# Altium PCB PCB1.PcbDoc
Units mil, origin at the board's own origin, x right, y up, seen from the top; angles counter-clockwise.
Board outline 3700 x 3500 mil, 2 copper layers (Top Layer, Bottom Layer); 47 components, 38 nets, 172 pads, 28 vias.
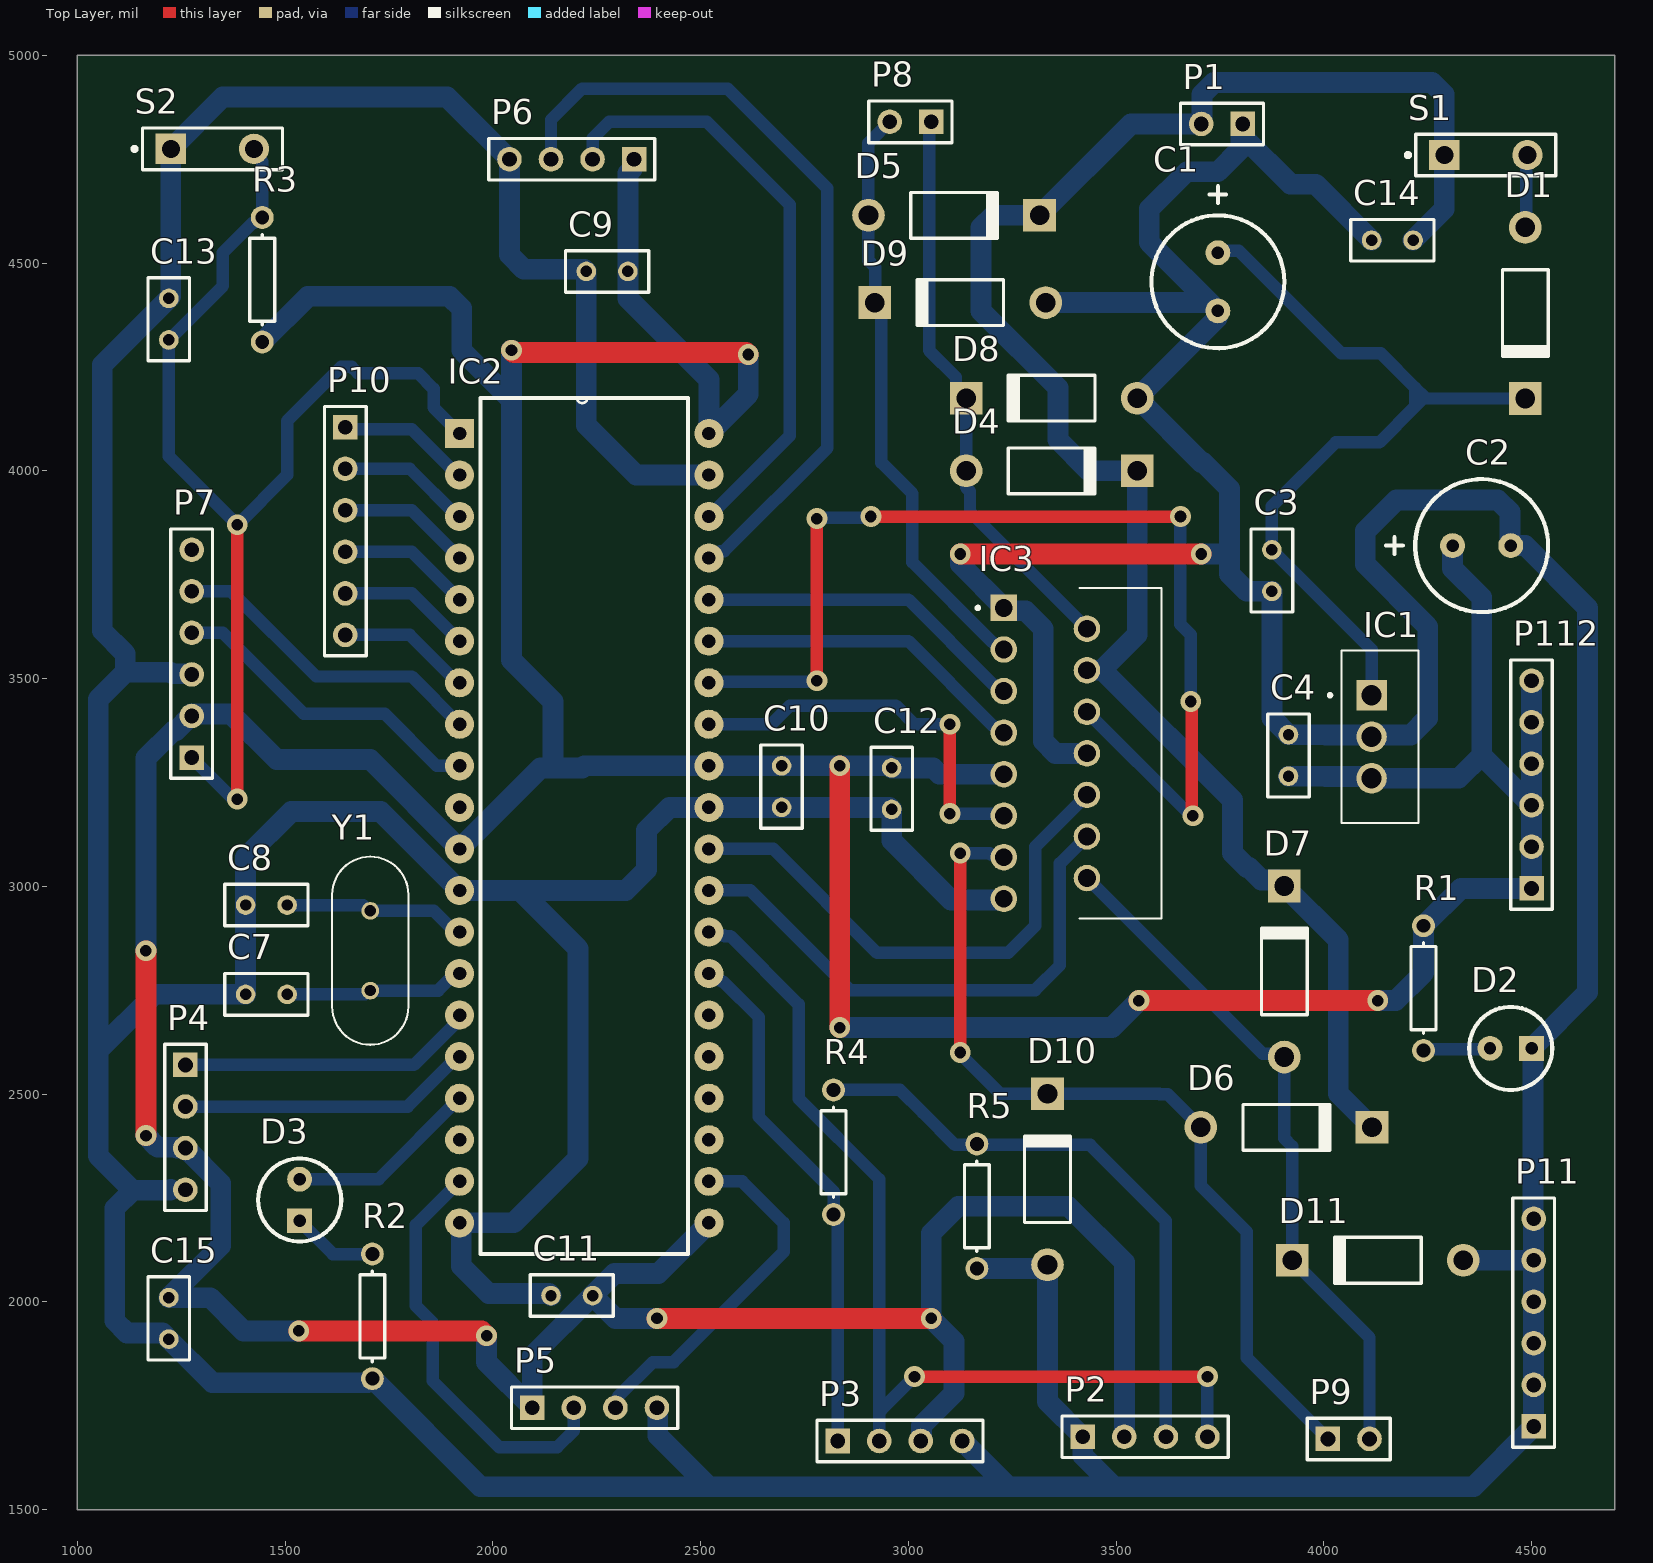
[diagram p0: Top Layer view]
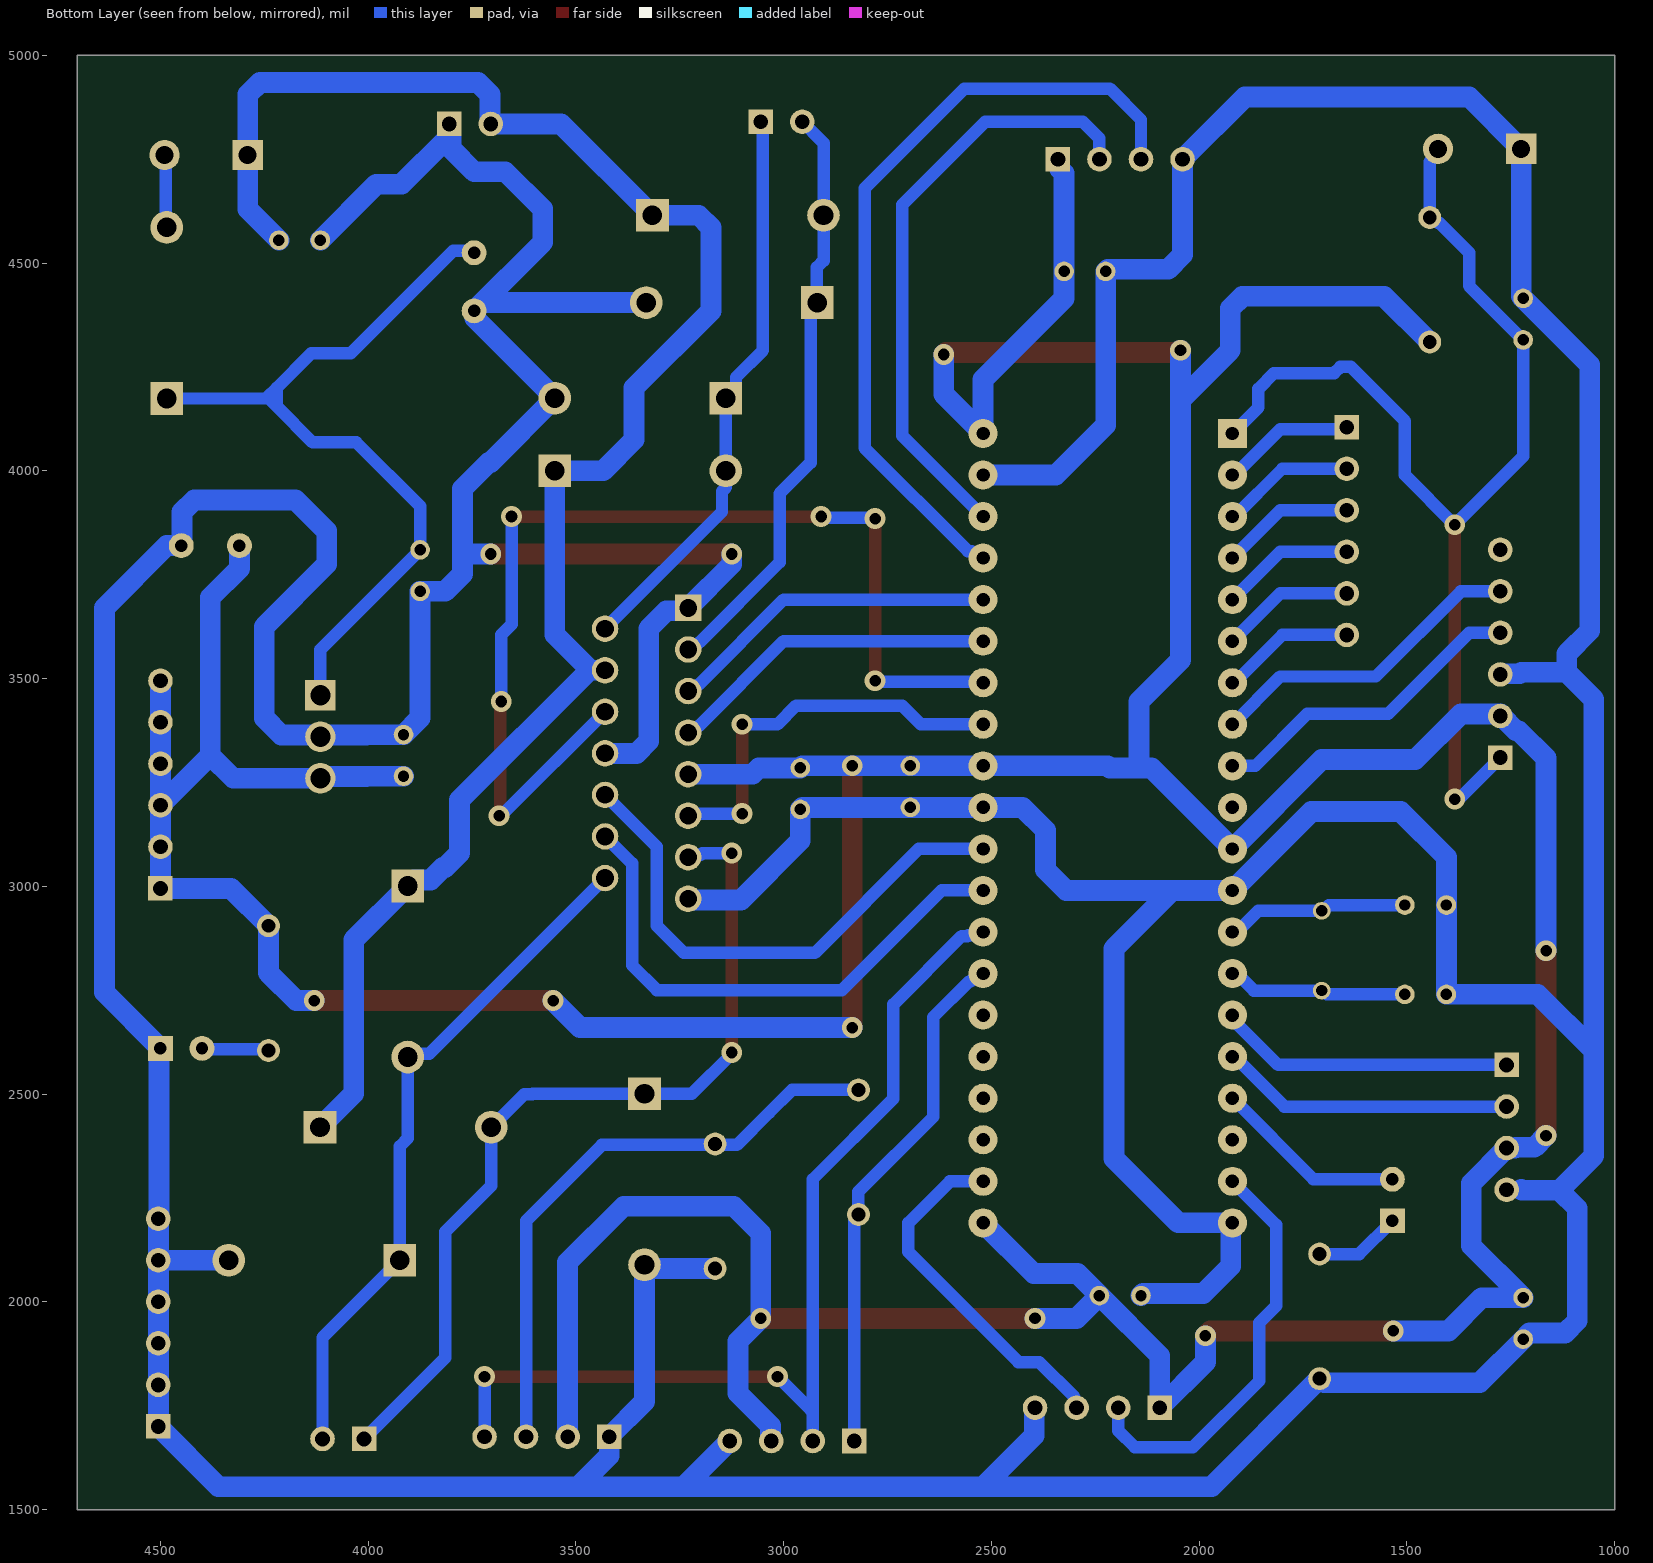
[diagram p1: Bottom Layer view, seen from below]

## Layer stack, top to bottom
Top Solder: solder mask 0.4, Solder Resist, Dk 3.5
Top Layer: signal copper 1.4
Dielectric 1: dielectric 12.6, FR-4, Dk 4.8
Bottom Layer: signal copper 1.4
Bottom Solder: solder mask 0.4, Solder Resist, Dk 3.5

## Board outline
1000,1500 1000,5000 4700,5000 4700,1500

## Design rules (kind name [scope] priority, off if disabled: settings)
Clearance [All] p1: gap=10 ignorepadtopadclearanceinfootprint=FALSE except(0: Arc-Hole Track-Hole SMDPad-Hole THPad-Hole Via-Hole Fill-Hole Poly-Hole Region-Hole Text-Hole)
PolygonConnect [All] p1: connectstyle=Relief reliefconductorwidth=10 reliefentries=4 polygonreliefangle="90 Angle" airgapwidth=10
RoutingPriority RoutingPriority_1 [OnLayer('Top Layer')] p1: routingpriority=100
RoutingPriority [OnLayer('Bottom Layer')] p2: routingpriority=1
RoutingTopology RoutingTopology_1 [OnLayer('Top Layer')] p1: topology=Vertical
RoutingTopology [All] p2: topology=Shortest
RoutingVias [All] p1: holewidth=28 width=50 viastyle="Through Hole" minholewidth=28 minwidth=50 maxholewidth=28 maxwidth=50
SolderMaskExpansion [All] p1: expansion=4 istentingtop=FALSE
Width WidthSignal [InNetClass('SIGNAL')] p1: maxlimit=30 minlimit=30 preferedwidth=30 minimp=50.000000 maximp=50.000000 favimp=50.000000
Width WidthPower [InNetClass('POWER')] p2: maxlimit=50 minlimit=50 preferedwidth=50 minimp=50.000000 maximp=50.000000 favimp=50.000000
Width [All] p3: maxlimit=10 minlimit=10 preferedwidth=10
28 further rules are at their usual default settings.

## Classes and differential pairs
net class SIGNAL: ENA ENB IN1 IN2 IN3 IN4 MCLR NetC1_1 NetD1_1 NetD2_1 NetD3_1 NetD3_2 OUT1 OUT2 OUT3 OUT4 PGC PGD RB0 RB1 RB2 RB3 RB4 RB5 RB9 RB10 RD2 RD3 Rx_bluetooth Tx_bluetooth U1ARX U1ATX U2TX XTAL1 XTAL2
net class POWER: 5V GND VCC

## Components (designator, comment, footprint, x,y, rotation, side; value= is the part's Value field where it differs from the comment)
C1 "Cap Pol1" "elektrolitski kondenzator" 3745,4455 r270 top value=470u
C2 "Cap Pol1" "elektrolitski kondenzator" 4380,3820 r0 top value=470u
C3 "Cap" RAD-0.1 3875,3760 r90 top value=100n
C4 "Cap" RAD-0.1 3915,3315 r270 top value=100n
C7 "Cap" RAD-0.1 1455,2740 r0 top value=22p
C8 "Cap" RAD-0.1 1455,2955 r0 top value=22p
C9 "Cap" RAD-0.1 2275,4480 r180 top value=100n
C10 "Cap" RAD-0.1 2695,3240 r270 top value=100n
C11 "Cap" RAD-0.1 2190,2015 r180 top value=100n
C12 "Cap" RAD-0.1 2960,3235 r270 top value=100n
C13 "Cap" RAD-0.1 1220,4365 r270 top value=100n
C14 "Cap" RAD-0.1 4165,4555 r0 top value=100n
C15 "Cap" RAD-0.1 1220,1960 r90 top value=100n
D1 "Diode 1N4007" DO-41 4485,4380 r270 top
D2 "LED0" "LED dioda" 4450,2610 r180 top
D3 "LED0" "LED dioda" 1535,2245 r90 top
D4 "Diode 1N4007" DO-41 3345,4000 r0 top
D5 "Diode 1N4007" DO-41 3110,4615 r0 top
D6 "Diode 1N4007" DO-41 3910,2420 r0 top
D7 "Diode 1N4007" DO-41 3905,2795 r90 top
D8 "Diode 1N4007" DO-41 3345,4175 r180 top
D9 "Diode 1N4007" DO-41 3125,4405 r180 top
D10 "Diode 1N4007" DO-41 3335,2295 r90 top
D11 "Diode 1N4007" DO-41 4130,2100 r180 top
IC1 "LM7805CT/NOPB" TO254P1054X470X1955-3 4115,3360 r270 top
IC2 "DSPIC30F4013-30I/P" Mikrokontroler 2215,3145 r0 top
IC3 "L298N" TO127P2020X500X2100-15 3230,3670 r0 top
P1 "Header 2" HDR1X2 3805,4835 r180 top
P2 "Bluetooth" HDR1X4 3420,1675 r0 top
P3 "Prisluskivanje" HDR1X4 2830,1665 r0 top
P4 "UART komunikacija" HDR1X4 1260,2570 r270 top
P5 "HC-SR04" HDR1X4 2095,1745 r0 top
P6 "HC-SR04" HDR1X4 2340,4750 r180 top
P7 "Programator" HDR1X6 1275,3310 r90 top
P8 "Motor1" HDR1X2 3055,4840 r180 top
P9 "Motor2" HDR1X2 4010,1670 r0 top
P10 "GPIO" HDR1X6 1645,4105 r270 top
P11 "GND" HDR1X6 4505,1700 r90 top
P112 "Header 6" HDR1X6 4500,2995 r90 top
R1 "Res2" AXIAL-0.3 4240,2755 r90 top value=1k
R2 "Res2" AXIAL-0.3 1710,1965 r270 top value=1k
R3 "Res2" AXIAL-0.3 1445,4460 r270 top value=10k
R4 "Res2" AXIAL-0.3 2820,2360 r270 top value=4k7
R5 "Res2" AXIAL-0.3 3165,2230 r90 top value=10k
S1 "SW-SPST" SPST-2 4390,4760 r0 top
S2 "SW-PB" SPST-2 1325,4775 r0 top
Y1 "HC-49/U-S16000000ABJB" XTAL_HC49P488W43L1150T466H350 1705,2845 r270 top

## Footprints (in the part's own frame and the unit in brackets; to place one, negate y for a bottom-side part, rotate by r counter-clockwise, add the part's x,y. Pads: shape width x height; smd on the part's side, far side on the other; paste and mask are expansions set on the pad)
AXIAL-0.3 [mm] "Axial Device, Thru-Hole; 2 Leads; 0.3 in Pin Spacing"
  round 1.4 hole 0.85: 1(-3.81,0) 2(3.81,0)
  silkscreen extent -2.77,-0.76 2.77,0.76
DO-41 [mm] "Diode, Axial; Body 5.2 x 2.7 mm (LxDia. max), Lead Dia. 0.86 mm (max)"
  round 2 hole 1.2: 1(-5.23,0)
  rect 2x2 hole 1.2: 2(5.23,0)
  silkscreen extent -2.65,-1.4 2.75,1.4
"elektrolitski kondenzator" [mil]
  round 60 hole 30: 1(-70,0) 2(70,0)
  silkscreen extent -230,-160 160,160
HDR1X2 [mm] "Connector; Header; 2 Position"
  rect 1.5x1.5 hole 0.9: 1(0,0)
  round 1.5 hole 0.9: 2(2.54,0)
  silkscreen extent -1.27,-1.27 3.81,1.27
HDR1X4 [mm] "Connector; Header; 4 Position"
  rect 1.5x1.5 hole 0.9: 1(0,0)
  round 1.5 hole 0.9: 2(2.54,0) 3(5.08,0) 4(7.62,0)
  silkscreen extent -1.27,-1.27 8.89,1.27
HDR1X6 [mm] "Connector; Header; 6 Position"
  rect 1.5x1.5 hole 0.9: 1(0,0)
  round 1.5 hole 0.9: 2(2.54,0) 3(5.08,0) 4(7.62,0) 5(10.16,0) 6(12.7,0)
  silkscreen extent -1.27,-1.27 13.97,1.27
"LED dioda" [mil]
  round 60 hole 30: 1(50,0)
  rect 60x60 hole 30: 2(-50,0)
  silkscreen extent -100,-100 100,100
Mikrokontroler [mil]
  rect 70x70 hole 32: 1(-295,945)
  round 70 hole 32: 2(-295,845) 3(-295,745) 4(-295,645) 5(-295,545) 6(-295,445) 7(-295,345) 8(-295,245) 9(-295,145) 10(-295,45) 11(-295,-55) 12(-295,-155) 13(-295,-255) 14(-295,-355) 15(-295,-455) 16(-295,-555) 17(-295,-655) 18(-295,-755) 19(-295,-855) 20(-295,-955) 21(305,-955) 22(305,-855) 23(305,-755) 24(305,-655) 25(305,-555) 26(305,-455) 27(305,-355) 28(305,-255) 29(305,-155) 30(305,-55) 31(305,45) 32(305,145) 33(305,245) 34(305,345) 35(305,445) 36(305,545) 37(305,645) 38(305,745) 39(305,845) 40(305,945)
  silkscreen extent -245,-1030 255,1030
RAD-0.1 [mm] "Radial Cap, Thru-Hole; 2 Leads; 0.1 in Pin Spacing"
  round 1.2 hole 0.7: 1(-1.27,0) 2(1.27,0)
  silkscreen extent -2.54,-1.27 2.54,1.27
SPST-2 [mm] "Switch; 2 Leads"
  rect 1.85x1.85 hole 1.1: 1(-2.54,0)
  round 1.85 hole 1.1: 2(2.54,0)
  silkscreen extent -4.89,-1.27 4.28,1.27
TO127P2020X500X2100-15 [mm]
  rect 1.62x1.62 hole 1.08: 1(0,0)
  round 1.62 hole 1.08: 2(5.08,-1.27) 3(0,-2.54) 4(5.08,-3.81) 5(0,-5.08) 6(5.08,-6.35) 7(0,-7.62) 8(5.08,-8.89) 9(0,-10.16) 10(5.08,-11.43) 11(0,-12.7) 12(5.08,-13.97) 13(0,-15.24) 14(5.08,-16.51) 15(0,-17.78)
  silkscreen extent -1.69,-18.99 9.63,1.21
TO254P1054X470X1955-3 [mm]
  rect 1.86x1.86 / inner round 1.86 / far side rect 1.86x1.86 hole 1.24: 1(-2.54,0)
  round 1.86 hole 1.24: 2(0,0) 3(2.54,0)
  silkscreen extent -5.27,-2.64 5.27,2.86
XTAL_HC49P488W43L1150T466H350 [mm]
  round 1.08 hole 0.68: 1(-2.44,0) 2(2.44,0)
  silkscreen extent -5.75,-2.33 5.75,2.33, body extent -5.75,-2.33 5.75,2.33, height 3.5

## Part data
C1 C2: "Polarized Capacitor (Radial)", LatestRevisionDate=17-Jul-2002, LatestRevisionNote="Re-released for DXP Platform.", PackageDescription="Polarized Capacitor (Radial); 2 Leads", PackageReference=RB7.6-15, Published=8-Jun-2000, Publisher="Altium Limited"
C3 C4 C7 C8 C9 C10 C11 C12 C13 C14 C15: "Capacitor", LatestRevisionDate=17-Jul-2002, LatestRevisionNote="Re-released for DXP Platform.", PackageDescription="Radial Cap, Thru-Hole; 2 Leads; 0.3 in Pin Spacing", PackageReference=RAD-0.3, Published=8-Jun-2000, Publisher="Altium Limited"
D1 D4 D5 D6 D7 D8 D9 D10 D11: "1 Amp General Purpose Rectifier", Code_JEDEC=DO-204-AL, ComponentLink1Description="Manufacturer Link", ComponentLink1URL=http://www.fairchildsemi.com/, ComponentLink2Description=Datasheet, ComponentLink2URL=http://www.fairchildsemi.com/ds/1N%2F1N4001.pdf, DatasheetVersion=1998, LatestRevisionDate=17-Jul-2002, LatestRevisionNote="Re-released for DXP Platform.", PackageDescription="Diode, Axial; Body 5.2 x 2.7 mm (LxDia. max), Lead Dia. 0.86 mm (max)", PackageReference=DO-41, PackageVersion=Aug-1999, Published=8-Jun-2000, Publisher="Altium Limited"
D2 D3: "Typical INFRARED GaAs LED", LatestRevisionDate=08-Jul-2005, LatestRevisionNote="Mech Layer 1 removed.", PackageDescription="LED; 2 Leads", PackageReference=LED-0, Published=8-Jun-2000, Publisher="Altium Limited"
IC1: Package=None, Availability=Unavailable, MF="{'manufacturer': u'Texas Instruments'}", MP=LM7805CT/NOPB, Price=None
IC2: "Digital Signal Processors, DSP, DSC General Purpose", Package="DIP-40 Microchip", Check_prices=https://www.snapeda.com/parts/DSPIC30F4013-30I/P/Microchip/view-part/?ref=eda, MF=Microchip, MP=DSPIC30F4013-30I/P, SnapEDA_Link=https://www.snapeda.com/parts/DSPIC30F4013-30I/P/Microchip/view-part/?ref=snap
IC3: "Dual Full Bridge Motor Driver 15-Pin(15+Tab) MULTIWATT V Tube", Package=None, Availability=Unavailable, MP=L298N, Price=None
P1: "Header, 2-Pin", LatestRevisionDate=17-Jul-2002, LatestRevisionNote="Re-released for DXP Platform.", Publisher="Altium Limited"
P2 P3 P4 P5 P6: library part "Header 4", "Header, 4-Pin", LatestRevisionDate=17-Jul-2002, LatestRevisionNote="Re-released for DXP Platform.", Publisher="Altium Limited"
P7 P10 P11: library part "Header 6", "Header, 6-Pin", LatestRevisionDate=17-Jul-2002, LatestRevisionNote="Re-released for DXP Platform.", Publisher="Altium Limited"
P8 P9: library part "Header 2", "Header, 2-Pin", LatestRevisionDate=17-Jul-2002, LatestRevisionNote="Re-released for DXP Platform.", Publisher="Altium Limited"
P112: "Header, 6-Pin", LatestRevisionDate=17-Jul-2002, LatestRevisionNote="Re-released for DXP Platform.", Publisher="Altium Limited"
R1 R2 R3 R4 R5: "Resistor", LatestRevisionDate=17-Jul-2002, LatestRevisionNote="Re-released for DXP Platform.", PackageDescription="Axial Device, Thru-Hole; 2 Leads; 0.4 in Pin Spacing", PackageReference=AXIAL-0.4, Published=8-Jun-2000, Publisher="Altium Limited"
S1: "Single-Pole, Single-Throw Switch", LatestRevisionDate=17-Jul-2002, LatestRevisionNote="Re-released for DXP Platform.", PackageDescription="Switch; 2 Leads", PackageReference=SPST-2, Published=24-Mar-1999, Publisher="Altium Limited"
S2: "Switch", LatestRevisionDate=17-Jul-2002, LatestRevisionNote="Re-released for DXP Platform.", PackageDescription="Switch; 2 Leads", PackageReference=SPST-2, Published=24-Mar-1999, Publisher="Altium Limited"
Y1: "16 MHz Â±30ppm Crystal 18pF 50 Ohms HC-49/US", Package="HC-49/US Citizen Finetech Miyota", Check_prices=https://www.snapeda.com/parts/HC-49/U-S16000000ABJB/Citizen/view-part/?ref=eda, MF="Citizen Finedevice", MP=HC-49/U-S16000000ABJB, SnapEDA_Link=https://www.snapeda.com/parts/HC-49/U-S16000000ABJB/Citizen/view-part/?ref=snap

## Via types
v1: diameter 50, hole 28, Top Layer to Bottom Layer, 28 vias

## Nets (pads, with @x,y where several pads share a name; then routed paths per layer and width w, separated by ;. In a path a pad name is that pad's centre, name@x,y a point inside that pad or via, vN(x,y) a via of type N, cw(c..) or ccw(c..) an arc to the next point about the centre after c; other vN are vias at no path point)
5V: C2.1 C4.2 C9.1 C10.1 C11.1 C12.1 C15.2 IC1.3 IC2.11 IC2.21 IC2.32 IC2.40 IC3.9 P2.2 P3.3 P4.3 P5.1 P6.1 P7.2 P112.1 P112.2 P112.3 P112.4 P112.5 P112.6 R1.2 R3.2 | length 15463
  Top Layer w50: v1(1165,2845) 1165.05,2844.95 v1(1165.05,2399.95) ; v1(1533.04,1930) 1973.2,1930 v1(1985,1918.2) ; v1(2045,4290) 2050,4285 2610,4285 v1(2615,4280) ; v1(2395,1960) v1(3055,1960) ; v1(2835,2660) v1(2835,3290) ; v1(3555,2725) v1(4130,2725)
  Bottom Layer w50: v1(1165,2845) 1165,3308.55 1230.97,3374.53 1237.08,3374.53 1272.55,3410 1272.55,3411.73 P7.2@1275,3414.18 ; v1(1165.05,2399.95) 1193.27,2371.73 1238.27,2371.73 1240,2370 P4.3 1345,2285 1345,2135 C15.2 1320,2010 1400,1930 v1(1533.04,1930) ; P7.2@1275,3415 1370,3415 1480,3305 1705,3305 IC2.11 2115,3285 2145,3285 ; R3.2 1555,4420 1895.71,4420 1925,4390.71 1925,4290 2045,4170 ; v1(1985,1918.2) 1985,1855 P5.1 2095,1870 C11.1 ; v1(2045,4290) 2045,4170 ; P6.1 2335.47,4745.47 2335.47,4726.66 2325,4716.18 2325,4415 2520,4220 IC2.40 2615,4185 v1(2615,4280) ; v1(2395,1960) 2295,1960 C11.1 ; IC2.21 2398.09,2068.09 2293.09,2068.09 C11.1 ; v1(2835,2660) 3490,2660 v1(3555,2725) ; P3.3 3031.73,1666.73 3031.73,1701.73 3110,1780 3110,1905 v1(3055,1960) 3055,2165 3120,2230 3385,2230 3520,2095 P2.2 ; IC3.9 3075,3270 3060,3285 C12.1 2955,3290 v1(2835,3290) C10.1 IC2.32 2220,3290 2215,3285 2145,3285 ; C4.2 4003.71,3265 4004.27,3264.44 4110.56,3264.44 IC1.3 4325,3260 4380,3315 ; v1(4130,2725) 4173.22,2725 4240,2791.78 R1.2 4330,2995 P112.1 P112.2 P112.3 ; C2.1 4310,3765 4380,3695 4380,3315 ; P112.6 P112.5 P112.4 P112.3 ; 2045,4170 2045,3545 2145,3445 2145,3285 ; 4380,3315 P112.3
ENA: IC2.34 IC3.6 | length 2593.1
  Top Layer w30: v1(2780,3495) v1(2780,3885) ; v1(2910,3890) v1(3655,3890) ; v1(3680,3445) 3682.5,3442.5 3682.5,3172.5 v1(3685,3170)
  Bottom Layer w30: IC2.34 2522.5,3492.5 2777.5,3492.5 v1(2780,3495) ; v1(2780,3885) 2782.5,3887.5 2907.5,3887.5 v1(2910,3890) ; IC3.6 v1@3675,3175 ; v1@3655,3875 3655,3630.25 3680,3605.25 v1(3680,3445)
ENB: IC2.33 IC3.11 | length 964.4
  Top Layer w30: v1(3100,3175) v1(3100,3390)
  Bottom Layer w30: IC2.33 2670,3390 2715,3435 2970,3435 3015,3390 v1(3100,3390) ; v1(3100,3175) 3225,3175 IC3.11
GND: C1.2 C2.2 C3.1 C4.1 C7.1 C8.1 C9.2 C10.2 C11.2 C12.2 C13.1 C14.1 C15.1 D2.2 D8.1 D9.1 D10.1 D11.1 IC1.2 IC2.12 IC2.20 IC2.31 IC2.39 IC3.1 IC3.8 IC3.15 P1.1 P2.1 P3.4 P4.4 P5.4 P6.4 P7.3 P11.1 P11.2 P11.3 P11.4 P11.5 P11.6 R2.2 R5.1 S2.1 | length 22360.7
  Top Layer w50: v1(3125,3800) v1(3705,3800)
  Bottom Layer w50: 1225,2270 1223.27,2268.27 1133.27,2268.27 ; P7.3 1273.27,3511.73 1228.27,3511.73 1225,3515 1115,3515 ; C11.2 2135,2020 1990,2020 1923.83,2086.17 1923.83,2186.17 IC2.20 2050,2190 2205,2345 2205,2850 2065,2990 ; P5.4 2396.73,1743.27 2396.73,1678.27 2520,1555 ; IC2.39@2516.17,3993.83 IC2.39 2345,3990 2225,4110 C9.2 2220,4485 2075,4485 2040,4520 P6.4 1890,4900 1350,4900 S2.1 1225,4420 C13.1 1060,4255 1060,3615 1115,3560 1115,3515 ; v1(3125,3800) 3125,3775 IC3.1 3236.89,3663.11 3281.89,3663.11 3325,3620 3325,3349.29 3354.29,3320 IC3.8@3426.27,3320 ; P3.4 3230,1565 3230,1555 ; R5.1 3318.13,2080 3327.22,2089.09 D10.1 3335,1760 P2.1 3420,1630 3495,1555 ; IC3.15 3227.36,2967.36 3102.64,2967.36 2960,3110 C12.2 2955,3190 C10.2 2425,3190 2370,3135 2370,3040 2320,2990 2065,2990 ; D9.1 3722.29,4405 ; v1(3705,3800) 3773.27,3800 ; 3800.47,4800.47 3800.47,4775.47 3745,4720 3670,4720 3580,4630 3580,4550 C1.2 3743.09,4383.09 3743.09,4367.18 D8.1 3705.91,4020 3710,4020 3773.27,3956.73 3773.27,3800 ; P1.1 3809.53,4830.47 3809.53,4800.47 3920,4690 3980,4690 C14.1 ; D11.1 P11.5 ; 1050,2605 1050,3450 1115,3515 ; 1050,2605 1185,2740 C7.1 C8.1 1405,3070 1515,3180 1730,3180 IC2.12 2065,2990 ; 1050,2605 1050,2351.53 1133.27,2268.27 ; 1133.27,2268.27 1090,2225 1090,1954.29 1119.29,1925 1205,1925 C15.1 1325,1805 1698.62,1805 1708.62,1815 R2.2 1970,1555 2520,1555 ; 2520,1555 3230,1555 ; 3230,1555 3495,1555 ; 3495,1555 4360,1555 P11.1 P11.2 P11.3 P11.4 P11.5 ; 3773.27,3800 3773.27,3751.73 3815,3710 C3.1 3875,3405 C4.1 4003.71,3365 4004.27,3364.44 4110.56,3364.44 IC1.2 4119.44,3364.44 4209.44,3364.44 4250,3405 4250,3625 4100,3775 4100,3855 4175,3930 4418.8,3930 4448.09,3900.71 4448.09,3821.91 C2.2 4485,3820 4635,3670 4635,2745 D2.2 4503.27,2606.73 4503.27,2201.73 P11.6 P11.5
IN1: IC2.36 IC3.5 | length 801.1
  Bottom Layer w30: IC2.36 3000,3690 3203.11,3486.89 3203.97,3486.89 3220.86,3470 IC3.5
IN2: IC2.35 IC3.7 | length 801.1
  Bottom Layer w30: IC2.35 3000,3590 3203.11,3386.89 3203.97,3386.89 3220.86,3370 IC3.7
IN3: IC2.30 IC3.10 | length 1282.3
  Bottom Layer w30: IC2.30 2675,3090 2925,2840 3240,2840 3305,2905 3305,3095 IC3.10
IN4: IC2.29 IC3.12 | length 1306.2
  Bottom Layer w30: IC2.29 2620,2990 2860,2750 3305,2750 3365,2810 3365,3055 IC3.12
MCLR: C13.2 IC2.1 P7.1 R3.1 S2.2 | length 2753.4
  Top Layer w30: v1(1385,3210) v1(1385,3870)
  Bottom Layer w30: P7.1 1371.17,3213.83 1381.17,3213.83 v1(1385,3210) ; S2.2 1425,4763.41 1445,4743.41 R3.1 1438.2,4610 1425.64,4597.44 1422.44,4597.44 1350,4525 1350,4445 C13.2 1220,4035 v1(1385,3870) 1505,3990 1505,4120 1635.07,4250.07 1659.93,4250.07 1675,4235 1820,4235 1857.57,4197.43 1857.57,4152.43 IC2.1
NetC1_1: C1.1 C3.2 D1.2 IC1.1 | length 1964.7
  Bottom Layer w30: C1.1 3749.47,4529.47 3795.53,4529.47 4042.5,4282.5 4137.5,4282.5 4220,4200 ; IC1.1 4115,3570 C3.2 3875,3915 4028.75,4068.75 4133.75,4068.75 4220,4155 ; D1.2 4245.91,4174.09 4242.5,4177.5 ; 4220,4155 4242.5,4177.5 ; 4220,4155 4220,4200 ; 4220,4200 4242.5,4177.5
NetD1_1: D1.1 S1.2 | length 176.2
  Bottom Layer w30: D1.1 4487.5,4588.41 4487.5,4757.5 S1.2
NetD2_1: D2.1 R1.1 | length 161
  Bottom Layer w30: R1.1@4240,2607.5 4397.5,2607.5 D2.1
NetD3_1: D3.1 IC2.17 | length 465.8
  Bottom Layer w30: D3.1 1725,2295 IC2.17
NetD3_2: D3.2 R2.1 | length 208.1
  Bottom Layer w30: D3.2 1615,2115 R2.1
OUT1: D4.1 D8.2 IC3.2 P8.1 | length 1386.5
  Bottom Layer w30: P8.1@3060,4845 3050,4835 3050,4290 3114.72,4225.28 3114.72,4199.37 D8.2 3139.09,3960 3148.42,3950.67 3148.42,3901.58 IC3.2
OUT2: D5.1 D9.2 IC3.3 P8.2 | length 1439.8
  Bottom Layer w30: P8.2@2960,4845 2904.09,4789.09 D5.1 2904.09,4505.91 2920,4490 2920,4405.91 D9.2 2935,4389.09 2935,4020 3010,3945 3010,3780 3203.11,3586.89 3203.97,3586.89 3220.86,3570 IC3.3
OUT3: D6.1 D10.2 IC3.13 P9.1 | length 2121.4
  Top Layer w30: v1(3125,2600) v1(3125,3080)
  Bottom Layer w30: v1(3125,2600) 3125,2596.81 3220.91,2500.91 D10.2 3604.09,2500.91 3605,2500 3624.09,2500 D6.1 3704.09,2279.09 3815,2168.19 3815,1865 P9.1 ; v1(3125,3080) 3196.11,3080 3199.65,3076.46 3223.54,3076.46 IC3.13
OUT4: D7.1 D11.2 IC3.14 P9.2 | length 1673.7
  Bottom Layer w30: IC3.14 3853.29,2596.71 3897.39,2596.71 D7.1@3897.39,2583.52 ; D7.1 3905,2393.19 3924.09,2374.09 D11.2 ; D11.2@3914.33,2109.77 4110,1914.09 P9.2
PGC: IC2.8 P7.5 | length 777.5
  Bottom Layer w30: P7.5 1370,3710 1575,3505 1805,3505 IC2.8
PGD: IC2.9 P7.4 | length 777.5
  Bottom Layer w30: P7.4 1350,3610 1545,3415 1740,3415 1865,3290 IC2.9
RB0: IC2.2 P10.1 | length 322.6
  Bottom Layer w30: P10.1 1650.36,4099.64 1805,4099.64 1914.64,3990 IC2.2
RB1: IC2.3 P10.2 | length 322.6
  Bottom Layer w30: P10.2 1800,4005 1915,3890 IC2.3
RB2: IC2.4 P10.3 | length 322.6
  Bottom Layer w30: P10.3 1805,3905 IC2.4
RB3: IC2.5 P10.4 | length 322.6
  Bottom Layer w30: P10.4 1805,3805 IC2.5
RB4: IC2.6 P10.5 | length 322.6
  Bottom Layer w30: P10.5 1805,3705 IC2.6
RB5: IC2.7 P10.6 | length 322.6
  Bottom Layer w30: P10.6 1800,3605 1915,3490 IC2.7
RB9: IC2.38 P6.2 | length 1455.2
  Bottom Layer w30: P6.2 2240,4800 2280,4840 2515,4840 2715,4640 2715,4085 IC2.38
RB10: IC2.37 P6.3 | length 1910.2
  Bottom Layer w30: P6.3 2140,4845 2215,4920 2565,4920 2805,4680 2805,4055 2556.57,3806.57 2547.39,3806.57 2530.82,3790 IC2.37
RD2: IC2.22 P5.3 | length 863.5
  Bottom Layer w30: P5.3 2300.56,1750.56 2300.56,1770.56 2385,1855 2435,1855 2700,2120 2700,2190 2600,2290 IC2.22
RD3: IC2.19 P5.2 | length 1017.9
  Bottom Layer w30: IC2.19 1815,2185 1815,1990 1855,1950 1855,1810 2015,1650 2155,1650 2195,1690 P5.2
Rx_bluetooth: P2.3 R4.1 R5.2 | length 1450.5
  Bottom Layer w30: R4.1 2980,2510 3035,2455 3112.5,2377.5 3165,2377.5 3437.5,2377.5 3620,2195 P2.3
Tx_bluetooth: IC2.28 P2.4 P3.2 | length 2383
  Top Layer w30: v1(3015,1820) v1(3720,1820)
  Bottom Layer w30: IC2.28 2527.65,2882.35 2555.23,2882.35 2557.57,2880 2571.57,2880 2735.78,2715.78 2735.78,2489.22 2930,2295 2930,1739.53 P3.2 ; 2934.53,1739.53 v1(3015,1820) ; P2.4 v1(3720,1820)
U1ARX: IC2.16 P4.2 | length 719.7
  Bottom Layer w30: P4.2@1250,2470 P4.2 1795,2470 1915,2590 IC2.16
U1ATX: IC2.15 P4.1 | length 730.6
  Bottom Layer w30: P4.1@1245,2570 P4.1 1810,2570 1920,2680 IC2.15
U2TX: IC2.27 P3.1 R4.2 | length 1262.2
  Bottom Layer w30: IC2.27 2530.82,2790 2549.89,2770.93 2554.07,2770.93 2640,2685 2640,2445 2820,2265 2820,2203.2 2830,2193.2 P3.1
VCC: C14.2 D4.2 D5.2 D6.2 D7.2 IC3.4 P1.2 S1.1 | length 4448.2
  Bottom Layer w50: IC3.4 3467.64,3520 3780,3207.64 3780,3080 3815,3045 3820,3045 3849.72,3015.28 3890.63,3015.28 D7.2 4035,2870.91 4035,2500.91 D6.2 ; 3467.64,3522.64 3550.91,3605.91 D4.2 3435,4000 3360,4075 3360,4200 3175,4385 3175,4585.71 3204.29,4615 D5.2 3535.91,4835 P1.2 3706.73,4836.73 3706.73,4905.71 3736.02,4935 4260.71,4935 4290,4905.71 S1.1 4290,4630 C14.2
XTAL1: C8.2 IC2.13 Y1.1 | length 441.9
  Bottom Layer w30: C8.2 1687.67,2955 1701.61,2941.06 Y1.1 1858.11,2941.06 1909.18,2890 IC2.13
XTAL2: C7.2 IC2.14 Y1.2 | length 435.7
  Bottom Layer w30: C7.2 1692.68,2740 1701.61,2748.94 Y1.2 1868.11,2748.94 1909.18,2790 IC2.14
pads on no net: IC2.10 IC2.18 IC2.23 IC2.24 IC2.25 IC2.26 P7.6